# Altium PCB servo-connector.PcbDoc
Units mm, origin at the board's own origin, x right, y up, seen from the top; angles counter-clockwise.
Board outline 33.02 x 30.48 mm, 2 copper layers (Top Layer, Bottom Layer); 4 components, 4 nets, 16 pads, 0 vias.
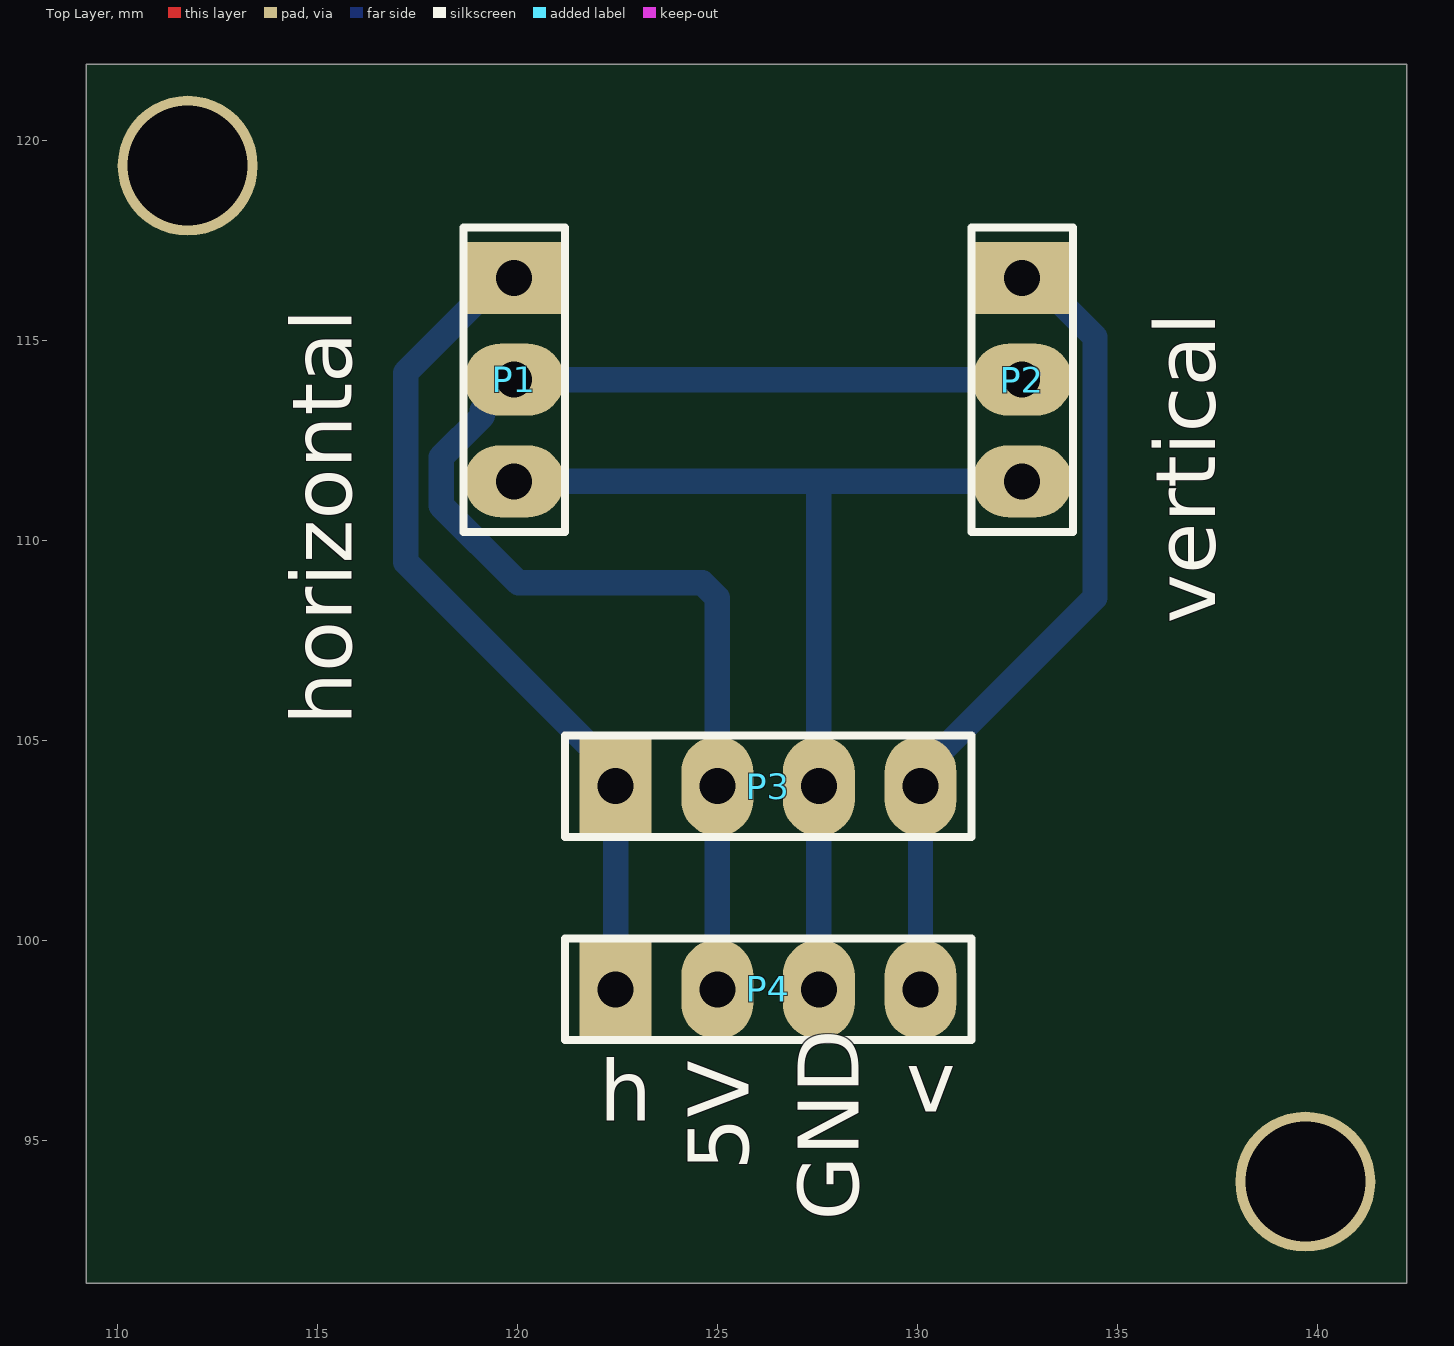
[diagram p0: Top Layer view]
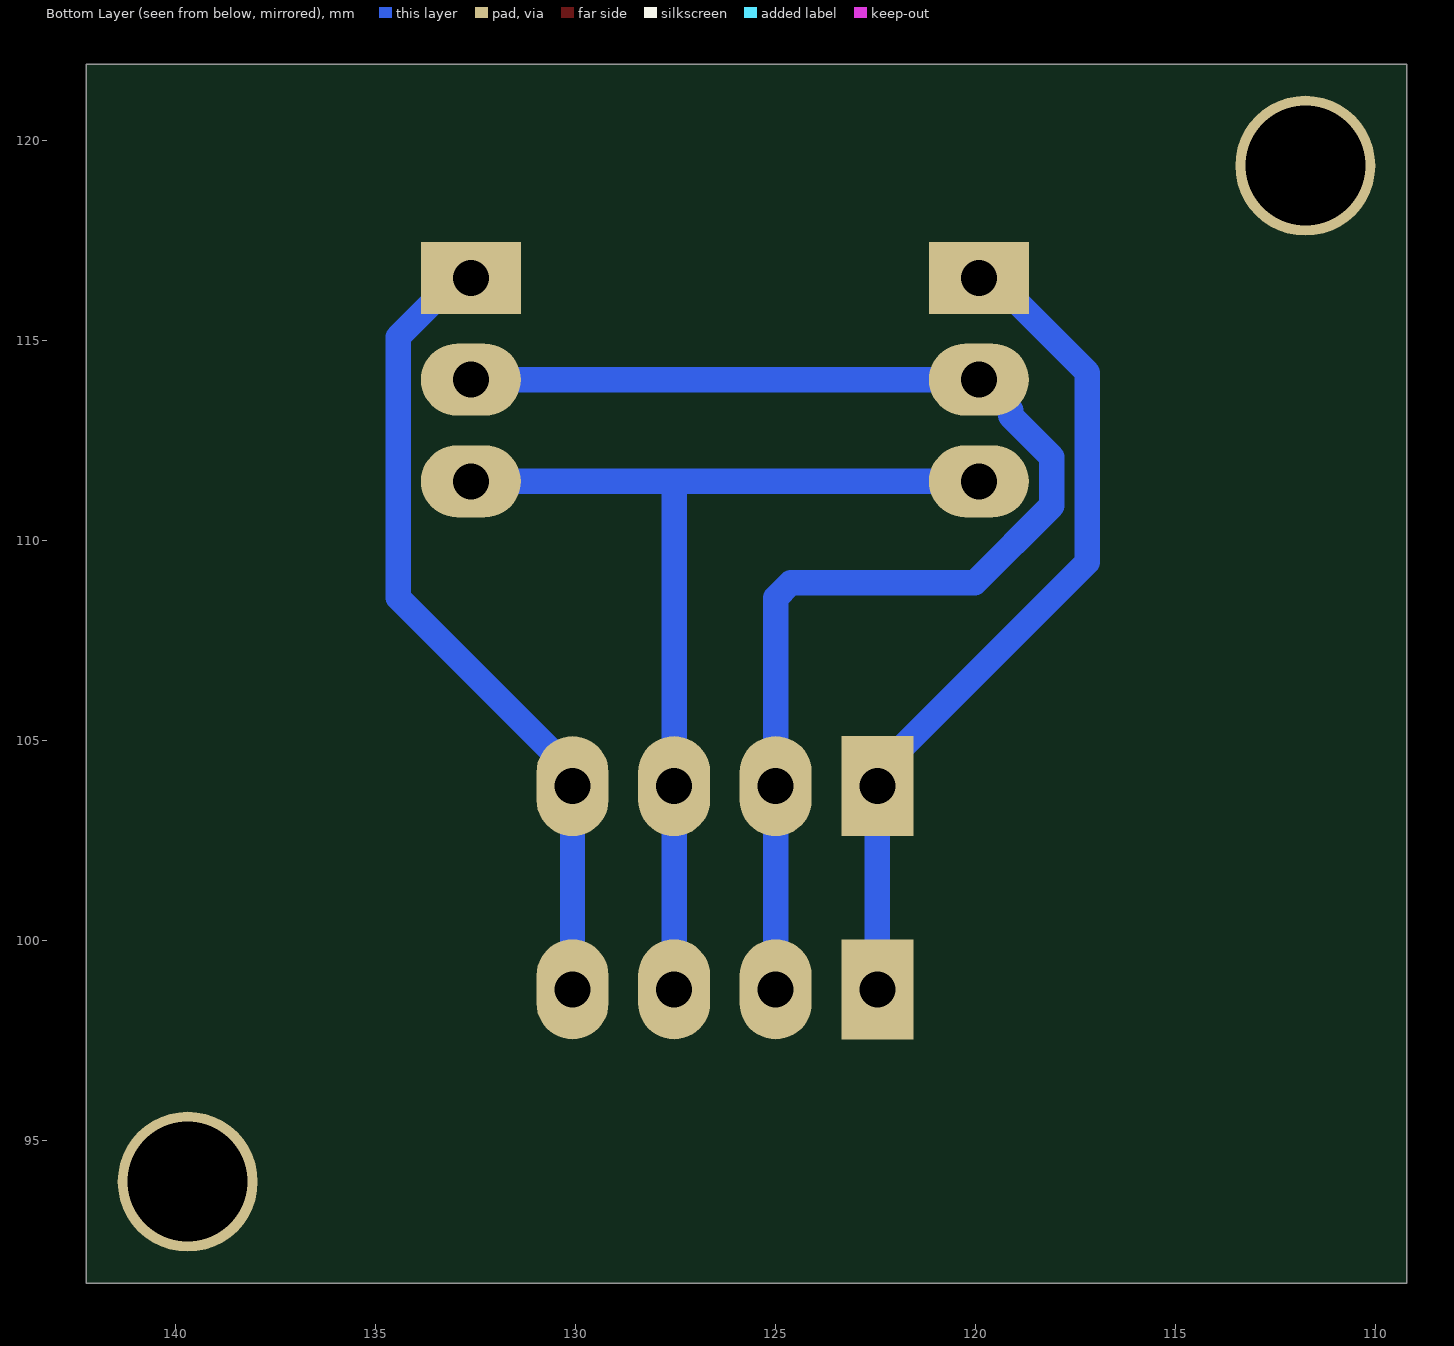
[diagram p1: Bottom Layer view, seen from below]

## Layer stack, top to bottom
Top Solder: solder mask 0.0102, Solder Resist, Dk 3.5
Top Layer: signal copper 0.0356
Dielectric1: dielectric 0.32, FR-4, Dk 4.8
Bottom Layer: signal copper 0.0356
Bottom Solder: solder mask 0.0102, Solder Resist, Dk 3.5

## Board outline
109.22,91.44 142.24,91.44 142.24,121.92 109.22,121.92

## Design rules (kind name [scope] priority, off if disabled: settings)
Clearance "Text (Polygon)" [inPolygon vs isText] p1: gap=0 ignorepadtopadclearanceinfootprint=FALSE
Clearance "Masseflaeche (Polygon)" [All vs inPolygon] p2: gap=0.508 ignorepadtopadclearanceinfootprint=FALSE except(0: Arc-Hole Track-Hole SMDPad-Hole THPad-Hole Via-Hole Fill-Hole Poly-Hole Region-Hole Text-Hole)
Clearance "Abstand (Clearance)" [All] p3: gap=0.254 ignorepadtopadclearanceinfootprint=FALSE except(0: Arc-Hole Track-Hole SMDPad-Hole THPad-Hole Via-Hole Fill-Hole Poly-Hole Region-Hole Text-Hole)
DiffPairsRouting [All] p1: maxlimit=0.381 minlimit=0.305 mostfreqgap=0.305 toplayer_minwidth=0.381 toplayer_maxwidth=0.381 toplayer_prefwidth=0.381 bottomlayer_minwidth=0.381 bottomlayer_maxwidth=0.381 bottomlayer_prefwidth=0.381 maxuncoupledlength=12.7
FabricationTestPointUsage TestPointUsage [All] p1: valid=0 allowmultiple=FALSE
FabricationTestpoint Testpoint [All] p1: side=3 testpointundercomponent=TRUE minsize=1.016 maxsize=2.54 preferedsize=1.524 minholesize=0 maxholesize=1.016 preferedholesize=0.813 testpointgrid=0.025 allowsidetop=TRUE allowsidebottom=TRUE usegrid=TRUE gridtolerance=0
HoleSize [All] p1: absolutevalues=TRUE maxlimit=2.54 minlimit=0.711 maxpercent=80.000 minpercent=20.000
HoleToHoleClearance [All] p1: gap=0.254 allowstackedmicrovias=FALSE
PlaneConnect [All] p1: planeconnectstyle=Relief reliefexpansion=0.508 reliefentries=4 reliefconductorwidth=0.813 reliefairgap=0.254
PolygonConnect [All] p1: connectstyle=Relief reliefconductorwidth=0.813 reliefentries=4 polygonreliefangle="90 Angle" airgapwidth=0.254
RoomDefinition servo-connector [InComponentClass('servo-connector')] p1: confinementstyle=ConfineIn formatcopy=TRUE lockcomponents=FALSE outline 218.44,58.42 236.22,58.42 236.22,73.66 218.44,73.66
RoutingVias [All] p1: holewidth=0.711 width=1.27 viastyle="Through Hole" minholewidth=0.711 minwidth=1.27 maxholewidth=0.711 maxwidth=1.27
SMDEntry [All] p1: side=TRUE corner=TRUE anyangle=FALSE
SilkToSilkClearance [All] p1 off: silktosilkclearance=0.254
SilkToSolderMaskClearance SilkscreenOverComponentPads [IsPad] p1 off: minsilkscreentomaskgap=0.254 clearancetoexposedcopper=TRUE
SolderMaskExpansion [All] p1: expansion=0.102 istentingtop=FALSE
UnRoutedNet [All] p1: checkbadconnections=TRUE
Width [All] p1: maxlimit=5.08 minlimit=0.279 preferedwidth=0.635 minimp=50.000000 maximp=50.000000 favimp=50.000000
21 further rules are at their usual default settings.

## Components (designator, comment, footprint, x,y, rotation, side; value= is the part's Value field where it differs from the comment)
P1 "Header 3" HDR1X3 119.92,116.57 r270 top
P2 "Header 3" HDR1X3 132.62,116.57 r270 top
P3 "Header 4" HDR1X4 122.46,103.87 r0 top
P4 "Header 4" HDR1X4 122.46,98.79 r0 top

## Footprints (in the part's own frame and the unit in brackets; to place one, negate y for a bottom-side part, rotate by r counter-clockwise, add the part's x,y. Pads: shape width x height; smd on the part's side, far side on the other; paste and mask are expansions set on the pad)
HDR1X3 [mm] "Connector; Header; 3 Position"
  rect 1.8x2.5 hole 0.9: 1(0,0)
  oval 1.8x2.5 hole 0.9: 2(2.54,0) 3(5.08,0)
  silkscreen extent -1.27,-1.27 6.35,1.27
HDR1X4 [mm] "Connector; Header; 4 Position"
  rect 1.8x2.5 hole 0.9: 1(0,0)
  oval 1.8x2.5 hole 0.9: 2(2.54,0) 3(5.08,0) 4(7.62,0)
  silkscreen extent -1.27,-1.27 8.89,1.27

## Part data
P1 P2: "Header, 3-Pin", LatestRevisionDate=17-Jul-2002, LatestRevisionNote="Re-released for DXP Platform.", Publisher="Altium Limited"
P3 P4: "Header, 4-Pin", LatestRevisionDate=17-Jul-2002, LatestRevisionNote="Re-released for DXP Platform.", Publisher="Altium Limited"

## Free pads (board coordinates)
  round 3.5 hole 3: 1(139.7,93.98) 2(111.76,119.38)

## Nets (pads, with @x,y where several pads share a name; then routed paths per layer and width w, separated by ;. In a path a pad name is that pad's centre, name@x,y a point inside that pad or via, vN(x,y) a via of type N, cw(c..) or ccw(c..) an arc to the next point about the centre after c; other vN are vias at no path point)
NetP1_1: P1.1 P3.1 P4.1 | length 21.3
  Bottom Layer w0.635: P1.1 119.57,116.57 117.21,114.209 117.21,109.47 122.46,104.22 P3.1 P4.1
NetP1_2: P1.2 P2.2 P3.2 P4.2 | length 34.3
  Bottom Layer w0.635: P4.2 P3.2 125,108.578 124.628,108.95 120.029,108.95 118.099,110.88 118.099,112.1 119.125,113.126 119.125,113.269 119.885,114.03 P1.2 P2.2
NetP1_3: P1.3 P2.3 P3.3 P4.3 | length 25.4
  Bottom Layer w0.635: P1.3 127.54,111.49 ; P4.3 P3.3 127.54,111.49 ; P2.3 127.54,111.49
NetP2_1: P2.1 P3.4 P4.4 | length 20.5
  Bottom Layer w0.635: P4.4 P3.4 130.08,104.22 134.442,108.581 134.442,115.098 132.97,116.57 P2.1

## Other copper
Top Layer:
  text "LAYOUT TOP" at 261.62,22.352 h1.78
  text "2" at 261.62,7.112 h1.78
Bottom Layer:
  text "LAYOUT BOTTOM" at 261.62,22.352 h1.78
  text "3" at 261.62,7.112 h1.78

## Silkscreen, mask and mechanical layers (free items; w line width, h text height)
Top Overlay:
  text "vertical" at 137.446,107.934 h1.52 r90
  text "horizontal" at 115.856,105.394 h1.52 r90
  text "v" at 129.719,95.729 h1.52
  text "h" at 122.044,95.504 h1.52
  text "5V" at 125.786,94.254 h1.52 r90
  text "GND" at 128.536,93.004 h1.52 r90
  text "BESTUECK. TOP" at 261.62,22.352 h1.78
  text "4" at 261.62,7.112 h1.78
Bottom Overlay:
  text "BESTUECK. BOTTOM" at 261.62,22.352 h1.78
  text "5" at 261.62,7.112 h1.78
Mechanical 16 (Blatt-Beschriftung):
  drawing of 350 lines, arcs and shapes, not listed
  text "1" at 36.246,189.611 h1.78
  text "2" at 108.89,189.611 h1.78
  text "3" at 182.042,189.611 h1.78
  text "4" at 254.94,189.611 h1.78
  text "A" at 1.905,166.599 h1.78
  text "A" at 288.925,166.599 h1.78
  text "B" at 1.905,118.542 h1.78
  text "B" at 288.925,118.542 h1.78
  text "C" at 1.905,70.028 h1.78
  text "C" at 288.925,70.028 h1.78
  text "TITEL:" at 173.99,33.02 h1.14
  text "PROJEKTNAME" at 175.26,29.972 h1.78
  text "NAME:" at 173.99,25.4 h1.14
  text "GRUPPE:" at 212.09,25.4 h1.14
  text "KLASSE:" at 233.172,25.4 h1.14
  text "DOKUMENTENART:" at 260.35,25.4 h1.14
  text "MAX MUSTERMANN" at 175.26,22.352 h1.78
  text "I" at 213.36,22.352 h1.78
  text "KLASSE" at 234.442,22.352 h1.78
  text "D" at 1.905,22.022 h1.78
  text "D" at 288.925,22.022 h1.78
  text "DATUM:" at 173.99,17.78 h1.14
  text "REVISION:" at 212.09,17.78 h1.14
  text "MASZSTAB:" at 233.172,17.78 h1.14
  text "DOKUMENTENSTATUS:" at 260.35,17.78 h1.14
  text "HTBLVA" at 140.97,15.24 h1.78
  text ".PRINT_DATE" at 175.26,14.732 h1.78
  text "0.1" at 213.36,14.732 h1.78
  text ".Print_Scale" at 234.442,14.732 h1.78
  text "ENTWURF" at 261.62,14.732 h1.78
  text "Abt. Elektronik" at 140.97,12.7 h1.78
  text "Anichstrasse 26-28" at 140.97,10.16 h1.78
  text "SACHNUMMER/DATEINAME:" at 173.99,10.16 h1.14
  text "BLATT:" at 260.35,10.16 h1.14
  text "BLAETTER:" at 274.32,10.16 h1.14
  text "A-6020 Innsbruck" at 140.97,7.62 h1.78
  text ".PCB_FILE_NAME_NO_PATH" at 175.26,7.112 h1.78
  text "6" at 275.59,7.112 h1.78
  text "1" at 36.246,1.651 h1.78
  text "2" at 108.89,1.651 h1.78
  text "3" at 182.042,1.651 h1.78
  text "4" at 254.94,1.651 h1.78
Drill Drawing:
  text ".LEGEND" at 20.32,38.1 h1.52
  text "BOHRPLAN" at 261.62,22.352 h1.78
  text "6" at 261.62,7.112 h1.78